# Altium PCB praxis_top_level_pcbdoc_v3_alimentador.PcbDoc
Units mm, origin at the board's own origin, x right, y up, seen from the top; angles counter-clockwise.
Board outline 152.4 x 79.5 mm, 4 copper layers (Top Layer, Int1 (GND), Int2 (PWR), Bottom Layer), stack 1.273 mm thick; 43 components, 266 nets, 129 pads, 129 vias.
Unrouted connection lines stored in the file: 4.
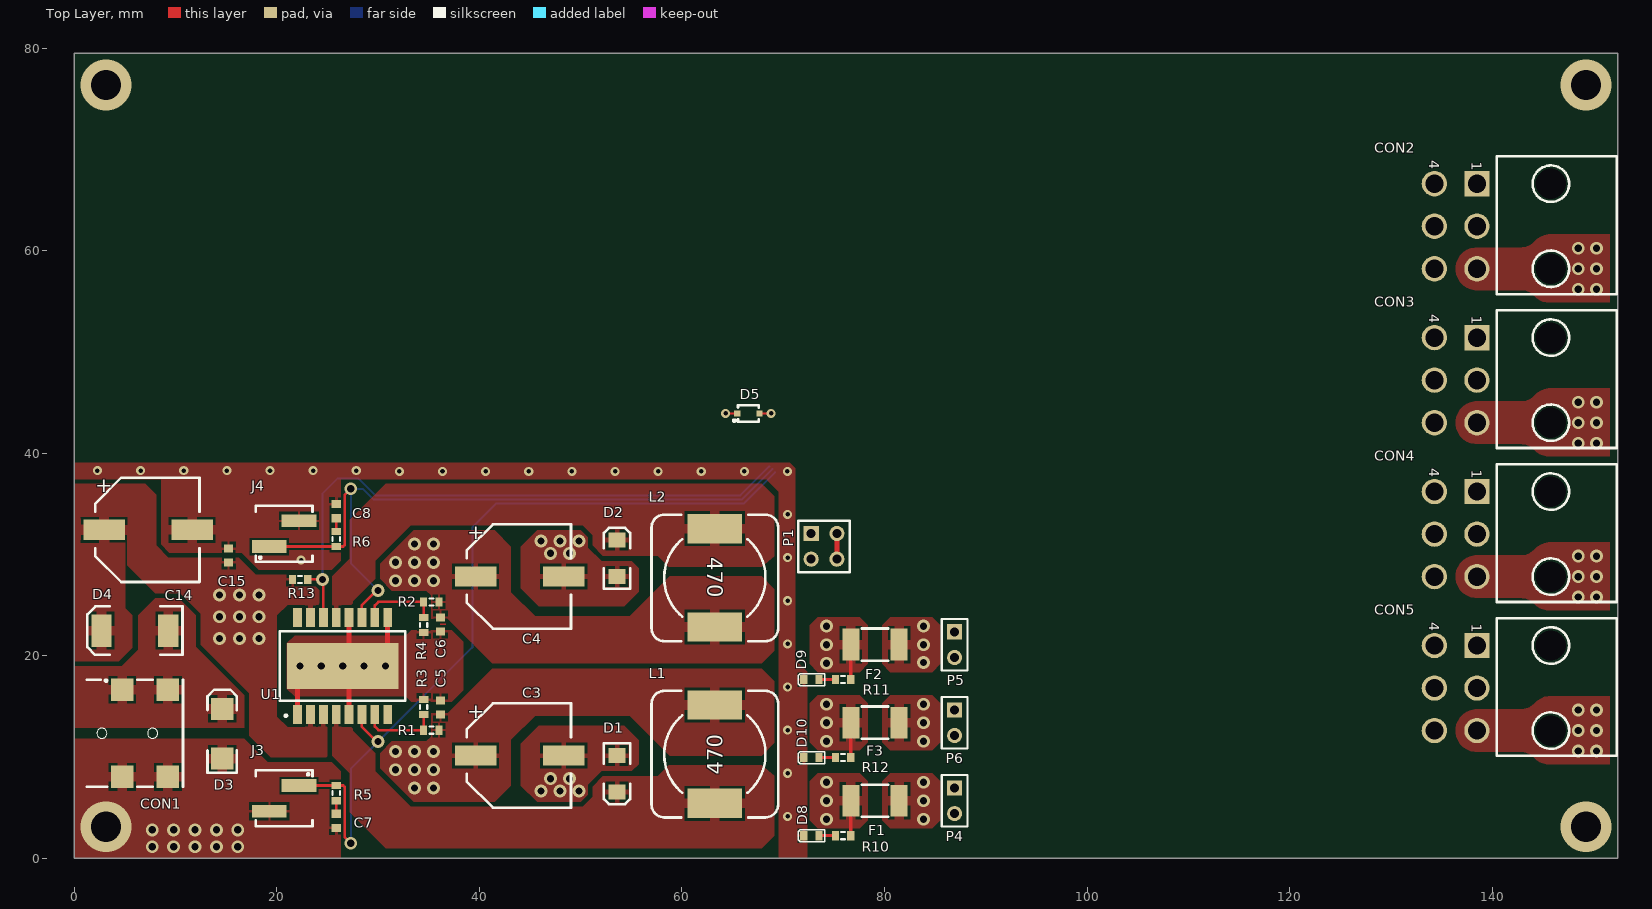
[diagram p0: Top Layer view]
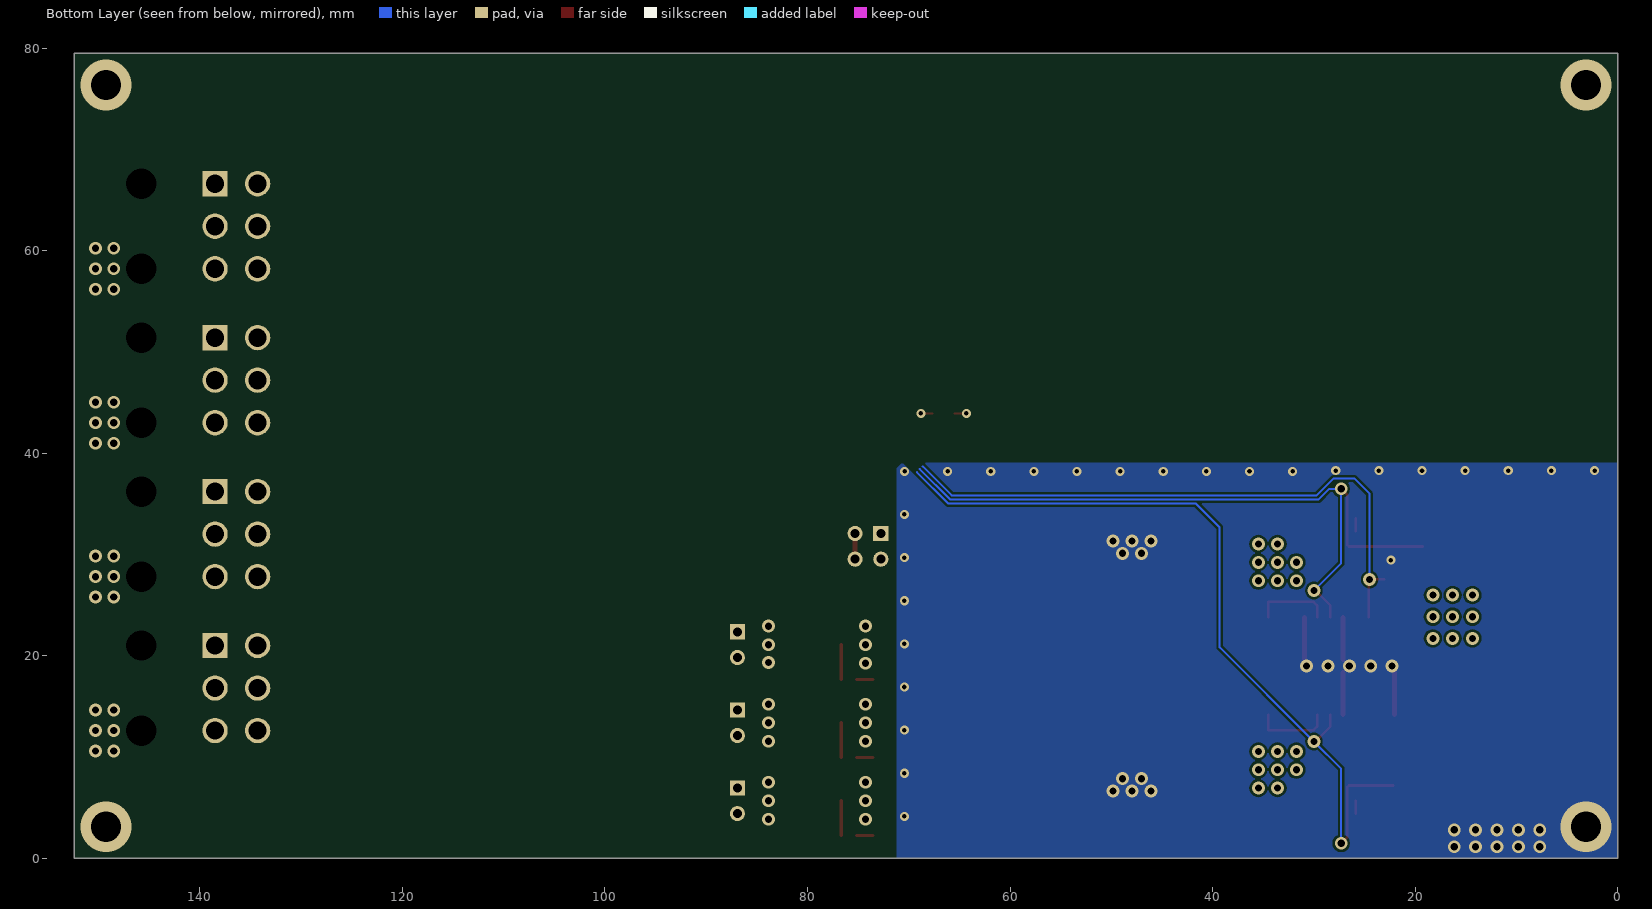
[diagram p1: Bottom Layer view, seen from below]
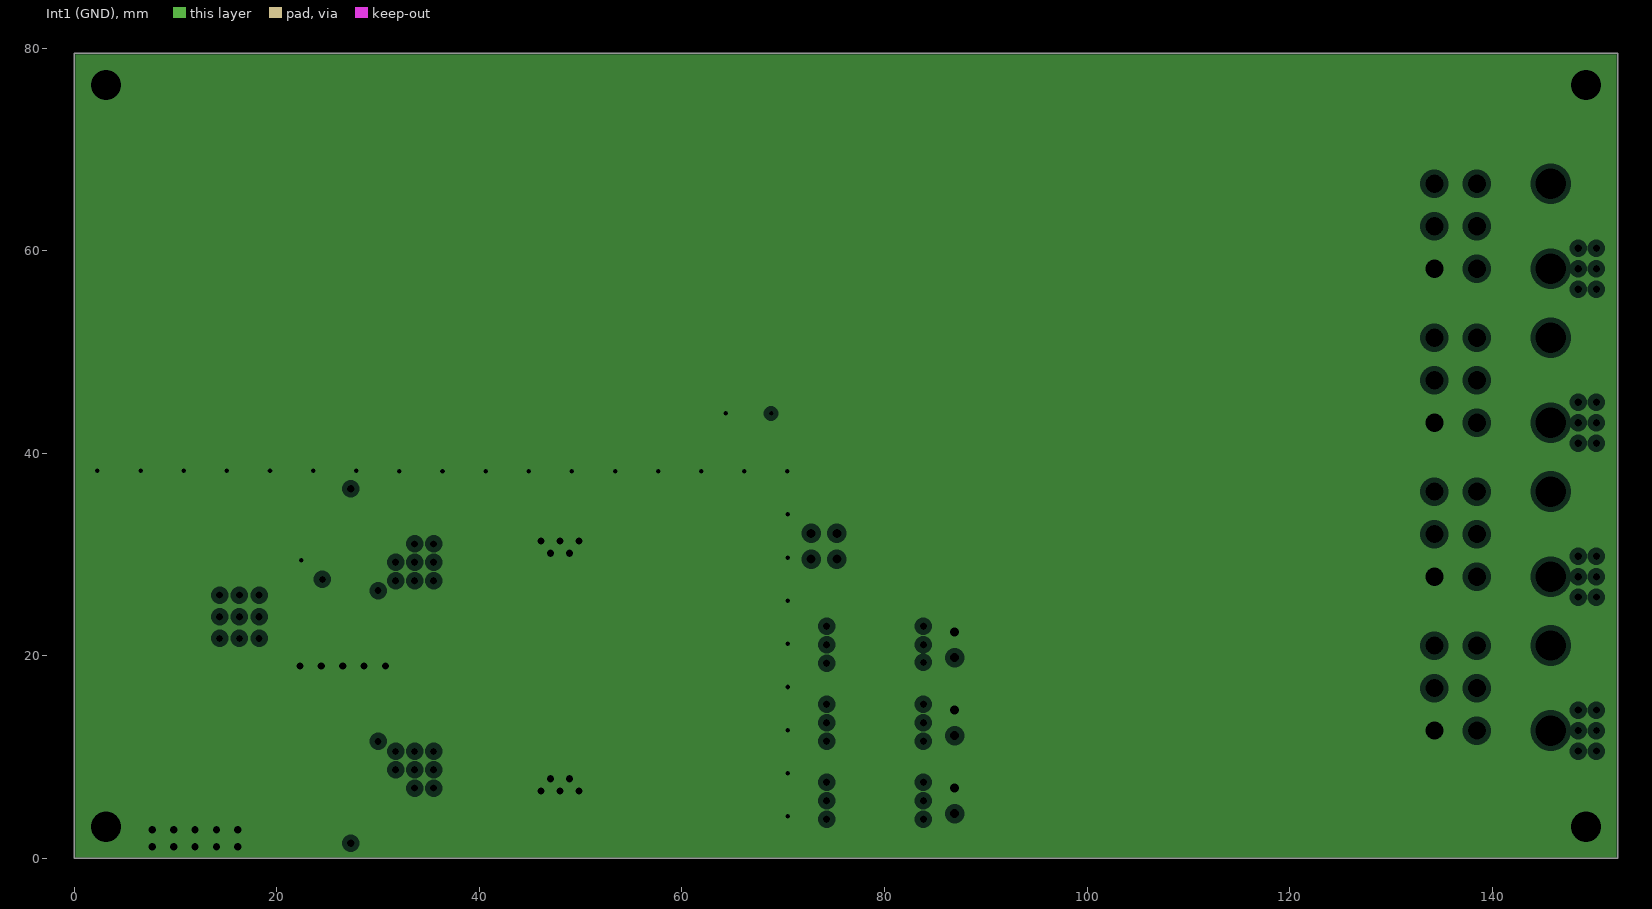
[diagram p2: Int1 (GND), clearances drawn from the general rule]
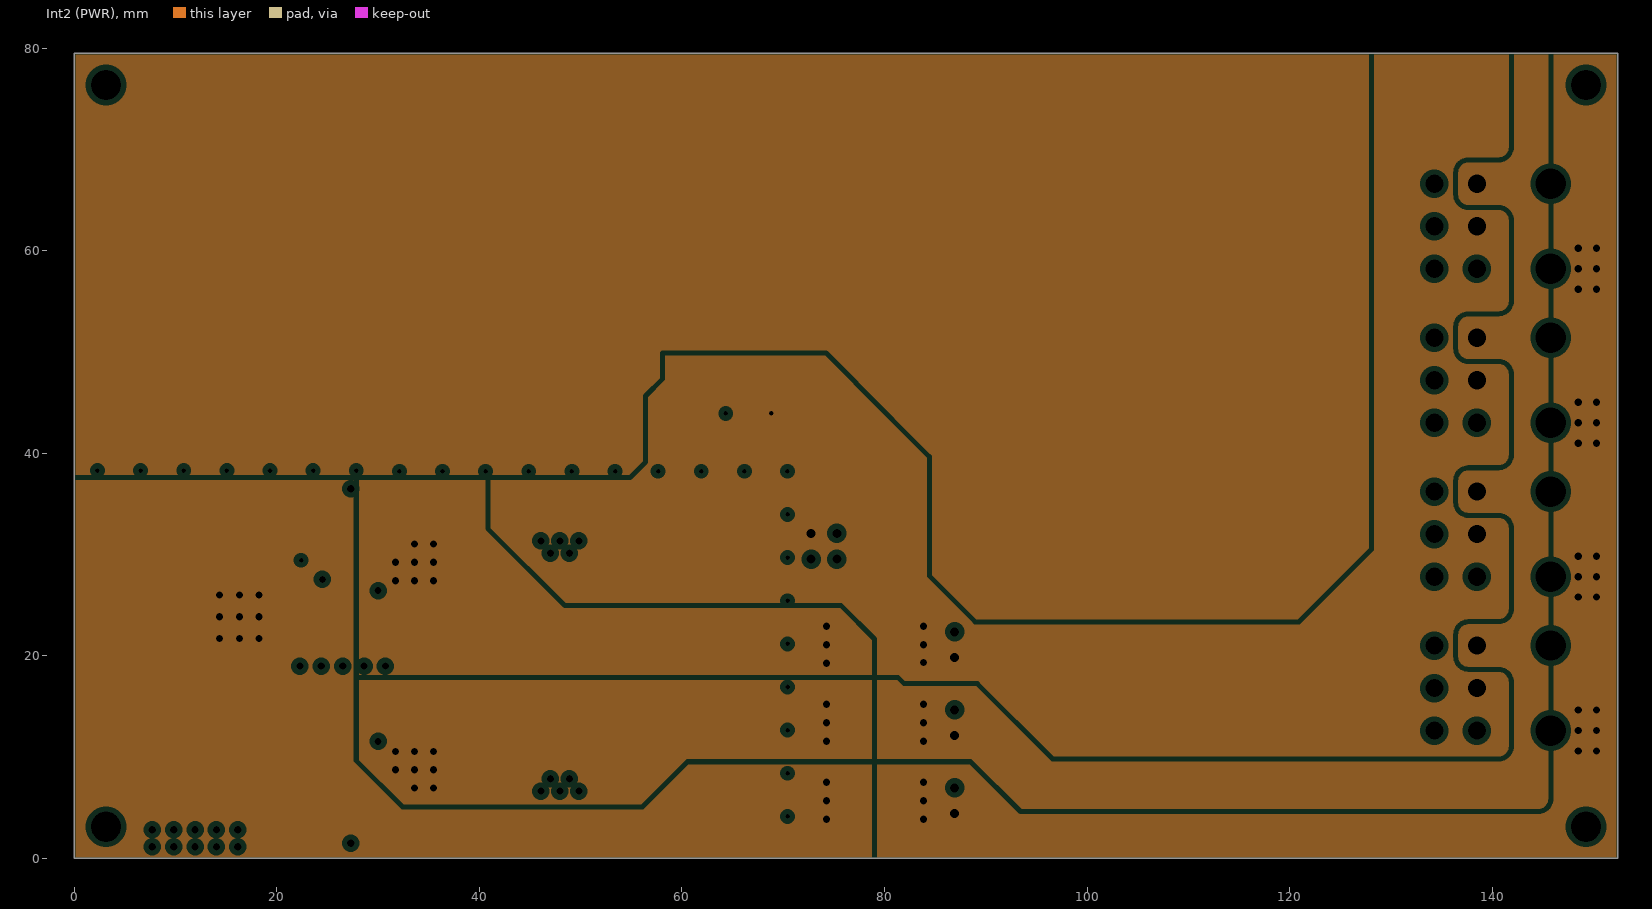
[diagram p3: Int2 (PWR), clearances drawn from the general rule]

## Layer stack, top to bottom
Top Solder: solder mask 0.0254, SM-001, Dk 4
Top Layer: signal copper 0.035
Dielectric 1: prepreg 0.0864, PP-010, Dk 4
Dielectric 2: prepreg 0.0864, PP-010, Dk 4
Int1 (GND): plane copper 0.035, net GND
Dielectric 3: core 0.7874, Core-040, Dk 4.6
Int2 (PWR): plane copper 0.035, net (Multiple Nets)
Dielectric 4: prepreg 0.0864, PP-010, Dk 4
Dielectric 5: prepreg 0.0864, PP-010, Dk 4
Bottom Layer: signal copper 0.035
Bottom Solder: solder mask 0.0254, SM-001, Dk 4

## Board outline
0,0 152.4,0 152.4,79.5 0,79.5

## Design rules (kind name [scope] priority, off if disabled: settings)
Clearance [All] p1: gap=0.254 ignorepadtopadclearanceinfootprint=FALSE except(0: Arc-Hole Track-Hole SMDPad-Hole THPad-Hole Via-Hole Fill-Hole Poly-Hole Region-Hole Text-Hole; 0.2: Arc-Arc Arc-Track Arc-SMDPad Track-Track Track-SMDPad SMDPad-SMDPad)
DiffPairsRouting DiffPairsRouting_STLINK_USB [InDifferentialPair('DP_STLINK_USB')] p1: maxlimit=0.254 minlimit=0.2 mostfreqgap=0.2 toplayer_minwidth=0.25 toplayer_maxwidth=0.381 toplayer_prefwidth=0.307 bottomlayer_minwidth=0.25 bottomlayer_maxwidth=0.381 bottomlayer_prefwidth=0.307 impedanceprofiledriven=TRUE impedanceprofileid={171DCBC4-E7A9-4E61-9777-8B6F89F70602} impedanceprofilevalue=90.000000 maxuncoupledlength=12.7
DiffPairsRouting DiffPairsRouting_USB_OTG_FS [InDifferentialPairClass('All Differential Pairs')] p2: maxlimit=0.254 minlimit=0.2 mostfreqgap=0.2 toplayer_minwidth=0.25 toplayer_maxwidth=0.381 toplayer_prefwidth=0.307 bottomlayer_minwidth=0.25 bottomlayer_maxwidth=0.381 bottomlayer_prefwidth=0.307 impedanceprofiledriven=TRUE impedanceprofileid={171DCBC4-E7A9-4E61-9777-8B6F89F70602} impedanceprofilevalue=90.000000 maxuncoupledlength=12.7
DiffPairsRouting DiffPairsRouting_ETH_TX [InDifferentialPairClass('DIFFPAIR_EHT_NET_TX')] p3: maxlimit=0.254 minlimit=0.21 mostfreqgap=0.21 toplayer_minwidth=0.25 toplayer_maxwidth=0.381 toplayer_prefwidth=0.25 bottomlayer_minwidth=0.25 bottomlayer_maxwidth=0.381 bottomlayer_prefwidth=0.25 impedanceprofiledriven=TRUE impedanceprofileid={305CB325-F830-419B-A8F2-9C7B33C04CC0} impedanceprofilevalue=100.000000 maxuncoupledlength=12.7
DiffPairsRouting DiffPairsRouting_ETH_RX [InDifferentialPairClass('DIFFPAIR_EHT_NET_RX')] p4: maxlimit=0.254 minlimit=0.21 mostfreqgap=0.21 toplayer_minwidth=0.25 toplayer_maxwidth=0.381 toplayer_prefwidth=0.25 bottomlayer_minwidth=0.25 bottomlayer_maxwidth=0.381 bottomlayer_prefwidth=0.25 impedanceprofiledriven=TRUE impedanceprofileid={305CB325-F830-419B-A8F2-9C7B33C04CC0} impedanceprofilevalue=100.000000 maxuncoupledlength=12.7
MatchedLengths "Schematic Matched Net Lengths_7" [InNet('Port_A11')] p1: tolerance=2.54 checknetsindiffpair=TRUE checkdiffpairvsdiffpair=FALSE checkxsignals=FALSE checkothers=FALSE
MatchedLengths "Schematic Matched Net Lengths_6" [InNet('Port_A12')] p2: tolerance=2.54 checknetsindiffpair=TRUE checkdiffpairvsdiffpair=FALSE checkxsignals=FALSE checkothers=FALSE
MatchedLengths "Schematic Matched Net Lengths_5" [InNet('DP_STLINK_USB_P')] p3: tolerance=2.54 checknetsindiffpair=TRUE checkdiffpairvsdiffpair=FALSE checkxsignals=FALSE checkothers=FALSE
MatchedLengths "Schematic Matched Net Lengths_4" [InNet('DP_STLINK_USB_N')] p4: tolerance=2.54 checknetsindiffpair=TRUE checkdiffpairvsdiffpair=FALSE checkxsignals=FALSE checkothers=FALSE
MatchedLengths "Schematic Matched Net Lengths_3" [InNet('DP_ETH_RX_N')] p5: tolerance=2.54 checknetsindiffpair=TRUE checkdiffpairvsdiffpair=FALSE checkxsignals=FALSE checkothers=FALSE
MatchedLengths "Schematic Matched Net Lengths_2" [InNet('DP_ETH_RX_P')] p6: tolerance=2.54 checknetsindiffpair=TRUE checkdiffpairvsdiffpair=FALSE checkxsignals=FALSE checkothers=FALSE
MatchedLengths "Schematic Matched Net Lengths_1" [InNet('DP_ETH_TX_N')] p7: tolerance=2.54 checknetsindiffpair=TRUE checkdiffpairvsdiffpair=FALSE checkxsignals=FALSE checkothers=FALSE
MatchedLengths "Schematic Matched Net Lengths" [InNet('DP_ETH_TX_P')] p8: tolerance=2.54 checknetsindiffpair=TRUE checkdiffpairvsdiffpair=FALSE checkxsignals=FALSE checkothers=FALSE
PlaneClearance [All] p1: clearance=0.508
PlaneConnect [All] p1: planeconnectstyle=Direct reliefexpansion=0.508 reliefentries=4 reliefconductorwidth=0.254 reliefairgap=0.254
PolygonConnect [All] p1: connectstyle=Relief reliefconductorwidth=0.254 reliefentries=4 polygonreliefangle="90 Angle" airgapwidth=0.254
RoutingVias [All] p1: holewidth=0.711 width=1.27 viastyle="Through Hole" minholewidth=0.4 minwidth=0.711 maxholewidth=0.711 maxwidth=1.27
SolderMaskExpansion [All] p1: expansion=0.102 istentingtop=FALSE
Width [All] p1: maxlimit=0.5 minlimit=0.2 preferedwidth=0.254 minimp=50.000000 maximp=50.000000 favimp=50.000000
27 further rules are at their usual default settings.

## Classes and differential pairs
net class Port_H[0..1]: Port_H0 Port_H1
net class Port_G[0..15]: Port_G0 Port_G1 Port_G2 Port_G3 Port_G4 Port_G5 Port_G6 Port_G7 Port_G8 Port_G9 Port_G10 Port_G11 Port_G12 Port_G13 Port_G14 Port_G15
net class Port_F[0..15]: Port_F0 Port_F1 Port_F2 Port_F3 Port_F4 Port_F5 Port_F6 Port_F7 Port_F8 Port_F9 Port_F10 Port_F11 Port_F12 Port_F13 Port_F14 Port_F15
net class Port_E[0..15]: Port_E0 Port_E1 Port_E2 Port_E3 Port_E4 Port_E5 Port_E6 Port_E7 Port_E8 Port_E9 Port_E10 Port_E11 Port_E12 Port_E13 Port_E14 Port_E15
net class Port_D[0..15]: Port_D0 Port_D1 Port_D2 Port_D3 Port_D4 Port_D5 Port_D6 Port_D7 Port_D8 Port_D9 Port_D10 Port_D11 Port_D12 Port_D13 Port_D14 Port_D15
net class Port_C[0..15]: Port_C0 Port_C1 Port_C2 Port_C3 Port_C4 Port_C5 Port_C6 Port_C7 Port_C8 Port_C9 Port_C10 Port_C11 Port_C12 Port_C13 Port_C14 Port_C15
net class Port_B[0..15]: Port_B0 Port_B1 Port_B2 Port_B3 Port_B4 Port_B5 Port_B6 Port_B7 Port_B8 Port_B9 Port_B10 Port_B11 Port_B12 Port_B13 Port_B14 Port_B15
net class Port_A[0..15]: Port_A0 Port_A1 Port_A2 Port_A3 Port_A4 Port_A5 Port_A6 Port_A7 Port_A8 Port_A9 Port_A10 Port_A11 Port_A12 Port_A13 Port_A14 Port_A15
differential pair class NET_CLASS_DP_STLINK_USB: DP_STLINK_USB
differential pair class DIFFPAIR_EHT_NET_TX: DP_ETH_TX
differential pair class DIFFPAIR_EHT_NET_RX: DP_ETH_RX
component class U_modulo_extension_schdoc: CON2 CON3 CON4 CON5
component class U_modulo_alimentador_schdoc: C3 C4 C5 C6 C7 C8 C14 C15 CON1 D1 D2 D3 D4 D8 D9 D10 F1 F2 F3 J3 J4 L1 L2 P1 P4 P5 P6 R1 R2 R3 R4 R5 R6 R10 R11 R12 R13 U1
differential pair DP_STLINK_USB: +DP_STLINK_USB_P -DP_STLINK_USB_N
differential pair DP_ETH_TX: +DP_ETH_TX_P -DP_ETH_TX_N
differential pair DP_ETH_RX: +DP_ETH_RX_P -DP_ETH_RX_N

## Components (designator, comment, footprint, x,y, rotation, side; value= is the part's Value field where it differs from the comment)
C3 "EEEFC1E471P" PCE4009CT 39.624,10.16 r0 top
C4 "EEEFC1E471P" PCE4009CT 39.624,27.84 r0 top
C5 "Cap Semi" 1608[0603] 36.152,14.9 r90 top value=100nF
C6 "Cap Semi" 1608[0603] 36.152,23.1 r270 top value=100nF
C7 "Cap Semi" 1608[0603] 25.865,3.709 r90 top value=1uF
C8 "Cap Semi" 1608[0603] 25.865,34.291 r270 top value=1uF
C14 "EEEFK1H221P" PCE4009CT 2.936,32.444 r0 top
C15 "Cap Semi" 1608[0603] 15.24,29.918 r90 top value=100nF
CON1 "PWR JACK" 694103107102 4.732,16.657 r90 top
CON2 "CONN_HEADER_RA_6POS" CONN_HEADER_RA_6POS 138.5,66.624 r270 top
CON3 "CONN_HEADER_RA_6POS" CONN_HEADER_RA_6POS 138.5,51.424 r270 top
CON4 "CONN_HEADER_RA_6POS" CONN_HEADER_RA_6POS 138.5,36.224 r270 top
CON5 "CONN_HEADER_RA_6POS" CONN_HEADER_RA_6POS 138.5,21.024 r270 top
D1 "SS26SHE3_A/H" SS26SHE3_A/H 53.594,10.16 r270 top
D2 "SS26SHE3_A/H" SS26SHE3_A/H 53.594,27.84 r90 top
D3 "P6SMB13CA" P6SMB13CA 14.605,9.857 r90 top
D4 "Diodo schottky" SK54L-TP 9.282,22.495 r180 top
D5 "PMEG1030EJ" PMEG1030EJ 67.662,43.937 r180 top
D8 "LTST-C191KRKT" LTST-C191KRKT 72.778,2.245 r180 top
D9 "LTST-C191KRKT" LTST-C191KRKT 72.778,17.655 r180 top
D10 "LTST-C191KRKT" LTST-C191KRKT 72.778,9.95 r180 top
F1 "MINISMDC110F-2" MINISMDC110F-2 76.67,5.695 r0 top
F2 "MINISMDC110F-2" MINISMDC110F-2 76.67,21.105 r0 top
F3 "MINISMDC110F-2" MINISMDC110F-2 76.67,13.4 r0 top
J3 "JUMPER_SMD" JUMPER_SMD 22.182,7.2 r270 top
J4 "JUMPER_SMD" JUMPER_SMD 19.262,30.8 r90 top
L1 "SRR1240-470M" SRR1240-470M 63.246,5.445 r90 top
L2 "SRR1240-470M" SRR1240-470M 63.246,32.555 r270 top
P1 "HEADER_2X2" HEADER_2X2 72.76,32.09 r0 top
P4 "Header 2" HDR1X2 86.925,6.965 r270 top
P5 "Header 2" HDR1X2 86.925,22.375 r270 top
P6 "Header 2" HDR1X2 86.925,14.67 r270 top
R1 "Res3" J1-0603 35.251,12.661 r0 top value=2.3K
R2 "Res3" J1-0603 35.251,25.339 r0 top value=4K
R3 "Res3" J1-0603 34.501,14.95 r270 top value=1K
R4 "Res3" J1-0603 34.501,23.05 r90 top value=1K
R5 "Res3" J1-0603 25.865,6.45 r90 top value=1K
R6 "Res3" J1-0603 25.865,31.55 r270 top value=1K
R10 "Res3" J1-0603 75.92,2.245 r0 top value=333
R11 "Res3" J1-0603 75.92,17.655 r0 top value=100
R12 "Res3" J1-0603 75.92,9.95 r0 top value=43
R13 "Res3" J1-0603 22.3,27.55 r180 top value=10K
U1 "SPI-8001TW" SPI-8001TW-TL 26.5,19 r90 top

## Footprints (in the part's own frame and the unit in brackets; to place one, negate y for a bottom-side part, rotate by r counter-clockwise, add the part's x,y. Pads: shape width x height; smd on the part's side, far side on the other; paste and mask are expansions set on the pad)
1608[0603] [mm] "Chip Capacitor, Body 1.6x0.8mm, IPC High Density"
  rect 0.8x0.9 smd: 1(-0.7,0) 2(0.7,0)
  body extent -0.8,-0.4 0.8,0.4, height 0.8
694103107102 [mm]
  rect 2.2x2.2 smd: 1(0,0) 1(0,-4.5) 2(-8.6,0) 3(-8.6,-4.5)
  silkscreen extent -9.6,-6 1,3.5, body extent -9.2,-5.8 0.6,3.5, height 5.29
CONN_HEADER_RA_6POS [mm]
  rect 2.5x2.5 hole 1.8: 1(0,0)
  round 2.5 hole 1.8: 2(4.2,0) 3(8.4,0) 4(0,-4.2) 5(4.2,-4.2) 6(8.4,-4.2)
  round 0 hole 3: ""(0,7.3) ""(8.4,7.3)
  silkscreen extent -2.7,1.97 10.9,13.8, body extent -3.23,-4.7 11.07,13.73, height 11.1
HDR1X2 [mm] "Connector; Header; 2 Position"
  rect 1.5x1.5 hole 0.9: 1(0,0)
  round 1.5 hole 0.9: 2(2.54,0)
  silkscreen extent -1.27,-1.27 3.81,1.27
HEADER_2X2 [mm]
  rect 1.5x1.5 hole 0.9: 1(0,0)
  round 1.5 hole 0.9: 2(2.54,0) 3(0,-2.54) 4(2.54,-2.54)
  silkscreen extent -1.27,-3.82 3.82,1.27, body extent -1.27,-3.83 3.81,1.26, height 8.49
J1-0603 [mm] "Chip Resistor, Body 1.6x0.8mm, IPC High Density"
  rect 0.7x0.9 smd: 1(-0.75,0) 2(0.75,0)
  silkscreen extent -0.2,-0.35 0.2,0.35, body extent -0.85,-0.48 0.85,0.48, height 0.9
JUMPER_SMD [mm]
  rect 1.27x3.43 smd: 1(0,0) 2(2.54,-2.92)
  silkscreen extent -1.5,-4.26 4.04,1.34, body extent -1.27,-4.1 3.81,1.18, height 17.21
LTST-C191KRKT [mm]
  rect 0.7x0.9 smd: 1(-0.747,0) 2(0.753,0)
  silkscreen extent -1.3,-0.6 1.3,0.6, body extent -0.85,-0.45 0.85,0.45, height 0.9
MINISMDC110F-2 [mm]
  rect 1.68x3.15 smd: 1(0,0) 2(4.78,0)
  silkscreen extent 1.09,-1.6 3.69,1.6, body extent 0.01,-1.72 4.76,1.71, height 0.49
P6SMB13CA [mm]
  rect 2.16x2.26 smd: 1(0,0) 2(4.9,0)
  silkscreen extent -1.4,-1.45 6.8,1.45, body extent -0.34,-1.97 5.24,1.97, height 2.49
PCE4009CT [mm]
  rect 4.1x2 smd: 1(0,0) 2(8.7,0)
  silkscreen extent -0.88,-5.15 9.42,5.15, body extent -1.47,-5.15 10.13,5.15, height 10.2
PMEG1030EJ [mm]
  rect 0.6x0.6 smd: 1(0,0) 2(2.2,0)
  silkscreen extent 0.07,-0.8 2.6,0.8, body extent -0.15,-0.67 2.35,0.68, height 1
SK54L-TP [mm]
  rect 2x3.2 smd: 1(0,0) 2(6.6,0)
  silkscreen extent -1.4,-2.4 8,2.4, body extent -0.76,-2.95 7.19,2.95, height 2.28
SPI-8001TW-TL [mm] "SOP, 16-Leads, Body 12,20x7,50mm, Pitch 1,27mm, Thermal Pad 11,00x4,50mm, IPC Medium Density"
  rect 1.9x0.87 smd: 1(-4.8,4.445) 2(-4.8,3.175) 3(-4.8,1.905) 4(-4.8,0.635) 5(-4.8,-0.635) 6(-4.8,-1.905) 7(-4.8,-3.175) 8(-4.8,-4.445) 9(4.8,-4.445) 10(4.8,-3.175) 11(4.8,-1.905) 12(4.8,-0.635) 13(4.8,0.635) 14(4.8,1.905) 15(4.8,3.175) 16(4.8,4.445)
  rect 4.5x11 smd: 17(0,0)
  silkscreen extent -5,-6.2 3.45,6.2, body extent -5.15,-5.1 5.15,5.1, height 3.48
SRR1240-470M [mm]
  rect 2.9x5.4 smd: 1(0,0) 2(9.7,0)
  silkscreen extent -1.4,-6.25 11.1,6.25, body extent -1.4,-6.25 11.1,6.25, height 4.5
SS26SHE3_A/H [mm]
  rect 1.52x1.68 smd: 1(0,0) 2(3.6,0)
  silkscreen extent -1.2,-1.3 4.8,1.3, body extent -0.95,-1.4 4.55,1.4, height 2.55

## Part data
C3 C4: "CAP ALUM 470uF 20% 25V SMD", Capacitance=470uF, Case/Package=Radial, ESR (Equivalent Series Resistance)=150mR, Leakage Current=3uA, Manufacturer=Panasonic, Max Operating Temperature=105°C, Min Operating Temperature=-40°C, Package Quantity=1, Ripple Current=670mA, Tolerance=20%, Voltage=25V, Category="Aluminum Electrolytic Capacitors", Contact Plating=Tin, Diameter=10mm, Height=10.2mm, Height - Seated (Max)=0.402inch, Impedance=150mR, Lead Diameter=0.9mm, Lead Free="Lead Free", Lead Pitch=4.6mm, Length=10.5mm, Life (Hours)=1000Hour, Manufacturer Part Number=EEEFC1E471P, Material=Aluminium, Mount="Surface Mount,PCB", Packaging="Tape and Reel", Radiation Hardening=No, REACH SVHC="No SVHC", Ripple Current (AC)=670mA, Supplier 1=Digi-Key, Termination=SMD/SMT, Voltage Rating=25V, Voltage Rating (DC)=25V, Width=900um
C5 C6 C7 C8 C15: "Capacitor (Semiconductor SIM Model)", LatestRevisionDate=29-May-2009, LatestRevisionNote="IPC-7351 Footprint Added.", PackageDescription="Chip Capacitor", PackageReference=C1206, Published=8-Jun-2000, Publisher="Altium Limited"
C14: "CAP ALUM 220UF 20% 50V SMD", Capacitance=220uF, Case/Package=Radial, Dielectric Material=Aluminium, ESR (Equivalent Series Resistance)=180mR, Leakage Current=3uA, Manufacturer=Panasonic, Manufacturer Part Number=EEE-FK1H221P, Max Operating Temperature=105°C, Min Operating Temperature=-55°C, Package Quantity=500, Ripple Current=670mA, Tolerance=20%, Voltage=50V, Category="Aluminum Electrolytic Capacitors", Contact Plating=Tin, Diameter=10mm, Height=10.2mm, Height - Seated (Max)=0.413inch, Impedance=180mR, Lead Free="Lead Free", Length=10.2mm, Life (Hours)=2000Hour, Material=Aluminium, Mount="Surface Mount,PCB", Number of Pins=2, Packaging="Tape and Reel", Polarity=Polar, Radiation Hardening=No, REACH SVHC="No SVHC", Ripple Current (AC)=670mA, Supplier 1="Future Electronics", Termination=SMD/SMT, Voltage Rating=50V, Voltage Rating (DC)=50V, Width=12mm
CON1: library part 694103107102, "CONN PWR JACK DC RA SMD", Color=Black, Current Rating=5A, Flammability Rating="UL94 V-0", Insulation Resistance=100MR, Manufacturer="Wurth Electronics", Max Operating Temperature=85°C, Min Operating Temperature=-40°C, Package Quantity=500, Voltage Rating=18V, Category=Connectors, ComponentLink1Description=http://www.mouser.com/ds/2/445/6941xx107102-469263.pdf?src-supplier=Mouser, ComponentLink1URL=http://www.mouser.com/ds/2/445/6941xx107102-469263.pdf?src-supplier=Mouser, ComponentLink2Description=http://www.farnell.com/cad/2130962.pdf?src-supplier=Element14, ComponentLink2URL=http://www.farnell.com/cad/2130962.pdf?src-supplier=Element14, Connector Type=Jack,Power, Contact Gender=Female, Contact Material="Copper Alloy", Contact Plating=Tin, Gender=Male, Housing Material=Polyamide, Manufacturer Part Number=694103107102, Mount="Surface Mount", Packaging="Tape and Reel", Pricing 1="1=1,56000, 10=1,48500, 50=1,32600, 100=1,22000 (USD)", REACH SVHC=Unknown, RoHS=Yes, Shielding=Unshielded, Stock 1=467, Supplier 1=Digi-Key, Termination=SMD/SMT, Voltage Rating (DC)=18V
CON2 CON3 CON4 CON5: "Conector hembra de 6 posiciones molex", Current Rating=8A, Manufacturer=Molex, Manufacturer Part Number=45732-0001, Max Operating Temperature=105°C, Min Operating Temperature=-40°C, Package Quantity=300, Voltage Rating=600V, Category="Headers and Wire Housings", Contact Material=Brass, Contact Plating=Tin, Gender=Male, Housing Material=Thermoplastic, Mount="Through Hole", Number of Contacts=6, Number of Positions=6, Number of Rows=2, Orientation="Right Angle", Packaging=Tray, Pitch=4.2mm, Radiation Hardening=No, Row Spacing=4.2mm, Termination=Solder
D1 D2: "DIODE SCHOTTKY 60V 2A DO214AC", Average Rectified Current=2A, Case/Package=SMA, Forward Voltage=750mV, Manufacturer=Vishay, Manufacturer Part Number="SS26SHE3\"A/H", Max Forward Surge Current (Ifsm)=40A, Max Operating Temperature=150°C, Max Repetitive Reverse Voltage (Vrrm)=60V, Min Operating Temperature=-55°C, Package Quantity=1800, Peak Reverse Current=10mA, Category="Rectifier Diodes", Element Configuration=Single, Forward Current=2A, Height=2.29mm, Lead Free="Lead Free", Length=4.5mm, Max Reverse Voltage (DC)=60V, Mount="Surface Mount", Number of Pins=2, Packaging="Tape and Reel", Peak Non-Repetitive Surge Current=40A, Radiation Hardening=No, Reverse Voltage (DC)=60V, Supplier 1=Digi-Key, Termination=SMD/SMT, Weight=0.001199oz, Width=2.79mm
D3: "TVS DIODE 11.1V 18.2V DO214AA", Breakdown Voltage=12.4V, Case/Package=SMB, Clamping Voltage=18.2V, Leakage Current=1uA, Manufacturer=Littelfuse, Max Operating Temperature=150°C, Max Surge Current=33A, Min Operating Temperature=-55°C, Operating Supply Voltage=11.1V, Package Quantity=3000, Peak Pulse Current=33.5A, Peak Pulse Power=600W, Power Line Protection=No, Test Current=1mA, Category="TVS Diodes", ComponentLink1Description=https://datasheet.ciiva.com/331/littelfuse-tvs-diode-p6smb-datasheet-pdf-331680.pdf?src-supplier=Digi-Key, ComponentLink1URL=https://datasheet.ciiva.com/331/littelfuse-tvs-diode-p6smb-datasheet-pdf-331680.pdf?src-supplier=Digi-Key, ComponentLink2Description=https://datasheet.ciiva.com/331/littelfuse-tvs-diode-p6smb-datasheet-pdf-331681.pdf?src-supplier=Digi-Key, ComponentLink2URL=https://datasheet.ciiva.com/331/littelfuse-tvs-diode-p6smb-datasheet-pdf-331681.pdf?src-supplier=Digi-Key, ComponentLink3Description=https://datasheet.ciiva.com/331/littelfuse-tvs-diode-p6smb-datasheet-pdf-331679.pdf?src-supplier=Digi-Key, ComponentLink3URL=https://datasheet.ciiva.com/331/littelfuse-tvs-diode-p6smb-datasheet-pdf-331679.pdf?src-supplier=Digi-Key, Composition=Zener, Lead Free="Lead Free", Manufacturer Part Number=P6SMB13CA, Min Breakdown Voltage=12.4V, Mount="Surface Mount", Number of Bidirectional Channels=1, Number of Channels=1, Number of Elements=1, Number of Pins=2, Packaging="Tape and Reel", Polarity=Bidirectional, Pricing 1="1=0,38000, 10=0,28000, 100=0,19500, 500=0,12350, 1000=0,09880 (USD)", Reverse Breakdown Voltage=12.4V, Reverse Standoff Voltage=11.1V, RoHS=Yes, Stock 1=2958, Supplier 1=Digi-Key, Termination=SMD/SMT
D4: library part SK54L-TP, "DIODE SCHOTTKY 40V 5A DO214AB", Average Rectified Current=5A, Forward Voltage=550mV, Manufacturer=MCC, Max Operating Temperature=150°C, Max Repetitive Reverse Voltage (Vrrm)=40V, Max Reverse Current=1mA, Min Operating Temperature=-55°C, Natural Thermal Resistance=16°C/W, Package Quantity=1, Peak Non-Repetitive Surge Current=100A, Category="Rectifier Diodes", ComponentLink1Description=https://datasheet.ciiva.com/13064/sk52l-sk510ldo-214ab-50991-13064420.pdf?src-supplier=Mouser, ComponentLink1URL=https://datasheet.ciiva.com/13064/sk52l-sk510ldo-214ab-50991-13064420.pdf?src-supplier=Mouser, ComponentLink2Description=https://datasheet.ciiva.com/17442/sk52l-sk510ldo-214ab-17442205.pdf?src-supplier=Future+Electronics, ComponentLink2URL=https://datasheet.ciiva.com/17442/sk52l-sk510ldo-214ab-17442205.pdf?src-supplier=Future+Electronics, ComponentLink3Description=https://datasheet.ciiva.com/18567/sk52l-sk510ldo-214ab-18567181.pdf?src-supplier=Digi-Key, ComponentLink3URL=https://datasheet.ciiva.com/18567/sk52l-sk510ldo-214ab-18567181.pdf?src-supplier=Digi-Key, ComponentLink4Description=https://datasheet.ciiva.com/26844/getdatasheetpartid-202301-26844906.pdf?src-supplier=Verical, ComponentLink4URL=https://datasheet.ciiva.com/26844/getdatasheetpartid-202301-26844906.pdf?src-supplier=Verical, ComponentLink5Description=https://datasheet.ciiva.com/15045/sk52l-sk510ldo-214ab-15045311.pdf?src-supplier=Digi-Key, ComponentLink5URL=https://datasheet.ciiva.com/15045/sk52l-sk510ldo-214ab-15045311.pdf?src-supplier=Digi-Key, Element Configuration=Single, Lead Free="Lead Free", Manufacturer Part Number=SK54L-TP, Max Reverse Voltage (DC)=40V, Mount="Surface Mount", Number of Pins=2, Packaging="Tape and Reel", Pricing 1="1=0,44000, 10=0,35000, 100=0,27500, 500=0,19000, 1000=0,15000 (USD)", Radiation Hardening=No, RoHS=Yes, Stock 1=514, Supplier 1=Digi-Key
D5: "DIODE SCHOTTKY 10V 3A SOD323F", Manufacturer=Nexperia, Manufacturer Part Number=PMEG1030EJ,115, Supplier 1=Digi-Key
D8 D9 D10: "DIODO LED ROJO 0603", Case Code (Imperial)=0603, Case Code (Metric)=1608, Color=Red, Forward Current=30mA, Forward Voltage=2V, Lens Color=Colorless, Manufacturer="Vishay Lite-On", Max Operating Temperature=85°C, Min Operating Temperature=-55°C, Package Quantity=1, Power Dissipation=75mW, Reverse Voltage=5V, Test Current=20mA, Case/Package=0603, Category=LEDs, Depth=0.8mm, Dominant Wavelength=631nm, Height=0.55mm, Illumination Color=Red, Lead Free="Lead Free", Length=1.6mm, Lens Style=Clear,Diffused,Colorless,Rectangular, Lens Transparency=Clear, Luminous Intensity=54mcd, Manufacturer Part Number=LTST-C191KRKT, Mount="Surface Mount", Number of Elements=1, Number of LEDs=1, Number of Pins=2, Packaging="Tape and Reel", Power Rating=75mW, Radiation Hardening=No, Supplier 1=Digi-Key, Viewing Angle=130°, Voltage=2V, Wavelength=639nm, Width=0.8mm
F1 F2 F3: "LITTELFUSE - MINISMDC110F-2 - FUSE, PTC RESET, 8V, 1.1A, 1812", Hold Current=1.1A, Manufacturer=Littelfuse, Max Operating Temperature=85°C, Min Operating Temperature=-40°C, Operating Supply Voltage=8V, Category="PTC Resettable Fuses", ComponentLink1Description=http://www.farnell.com/datasheets/2282569.pdf?src-supplier=Farnell, ComponentLink1URL=http://www.farnell.com/datasheets/2282569.pdf?src-supplier=Farnell, ComponentLink2Description=http://www.farnell.com/datasheets/1468628.pdf?src-supplier=Farnell, ComponentLink2URL=http://www.farnell.com/datasheets/1468628.pdf?src-supplier=Farnell, ComponentLink3Description=https://www.littelfuse.com/~/media/electronics/product_specifications/resettable_ptcs/littelfuse_ptc_minismdc110f_2_product_specification.pdf.pdf?src-supplier=Digi-Key, ComponentLink3URL=https://www.littelfuse.com/~/media/electronics/product_specifications/resettable_ptcs/littelfuse_ptc_minismdc110f_2_product_specification.pdf.pdf?src-supplier=Digi-Key, ComponentLink4Description=http://www.farnell.com/datasheets/1468628.pdf?src-supplier=Element14, ComponentLink4URL=http://www.farnell.com/datasheets/1468628.pdf?src-supplier=Element14, ComponentLink5Description=http://www.littelfuse.com/~/media/electronics/datasheets/resettable_ptcs/littelfuse_ptc_minismd_catalog_datasheet.pdf.pdf?src-supplier=Digi-Key, ComponentLink5URL=http://www.littelfuse.com/~/media/electronics/datasheets/resettable_ptcs/littelfuse_ptc_minismd_catalog_datasheet.pdf.pdf?src-supplier=Digi-Key, ComponentLink6Description=http://www.farnell.com/datasheets/2282569.pdf?src-supplier=Newark, ComponentLink6URL=http://www.farnell.com/datasheets/2282569.pdf?src-supplier=Newark, Lead Free="Lead Free", Length=4.73mm, Manufacturer Part Number=MINISMDC110F-2, Pricing 1="1=0,22546, 10=0,20584, 30=0,19964, 50=0,18972, 100=0,18476 (USD)", REACH SVHC=Unknown, RoHS=No, Supplier 1=Digi-Key, Voltage Rating (DC)=8V
J3 J4: "Connector Header Surface Mount 2 position 0.100\" (2.54mm)", Color=Black, Manufacturer=Samtec, Manufacturer Part Number=TSM-102-01-L-SV-TR, Max Current Rating=7A, Max Operating Temperature=125°C, Max Voltage Rating (AC)=475V, Min Operating Temperature=-55°C, Category="Headers and Wire Housings", Connector Type="Male Pin", Contact Material=Bronze, Contact Mating Length=0.23inch, Contact Plating=Gold, Depth=2.54mm, Gender=Male, Housing Color=Black, Housing Material=Polymer, Lead Free="Lead Free", Length=5.08mm, Mount="Surface Mount", Number of Contacts=2, Number of Positions=2, Number of Rows=1, Orientation=Straight, Packaging="Tape and Reel", Pitch=2.54mm, Radiation Hardening=No, REACH SVHC="No SVHC", Supplier 1=Digi-Key, Termination=Solder
L1 L2: "FIXED IND 47uH 2A 135M Ohm SMD", Case/Package=Nonstandard, Current Rating=2A, DC Resistance (DCR)=135mR, Frequency=13MHz, Inductance=47uH, Inductance Tolerance=20%, Manufacturer=Bourns, Max Operating Temperature=125°C, Min Operating Temperature=-40°C, Package Quantity=800, Resistance=135MR, Saturation Current=1.8A, Test Frequency=100kHz, Category="Fixed Inductors", Composition=Wirewound, Core Material=Ferrite, DC Current=2A, Depth=12.8mm, Height=4mm, Height - Seated (Max)=0.177inch, Length=12.5mm, Manufacturer Part Number=SRR1240-470M, Material=Steel, Max DC Current=2A, Military Standard=Not, Mount="Surface Mount", Packaging="Cut Tape", Q Factor=19, Radiation Hardening=No, REACH SVHC="No SVHC", RMS Current (Irms)=2A, Self Resonant Frequency=13MHz, Shielding=Shielded, Supplier 1=Digi-Key, Termination=SMD/SMT, Tolerance=20%, Width=12.5mm
P1: "Header, 2-Pin X 2"
P4 P5 P6: "Header, 2-Pin", LatestRevisionDate=17-Jul-2002, LatestRevisionNote="Re-released for DXP Platform.", Publisher="Altium Limited"
R1 R2 R3 R4 R5 R6 R10 R11 R12 R13: "Resistor", LatestRevisionDate=29-May-2009, LatestRevisionNote="IPC-7351 Footprint Added.", PackageDescription="Chip Resistor", PackageReference=J1-0603, Published=8-Jun-2000, Publisher="Altium Limited"
U1: library part SPI-8001TW-TL, "IC REG BUCK ADJ 1.5A DL 16-HSOP", Case/Package=SOIC, Manufacturer="Allegro MicroSystems Sanken", Max Input Voltage=20V, Max Operating Temperature=135°C, Max Output Voltage=16V, Min Input Voltage=4V, Min Operating Temperature=-30°C, Min Output Voltage=1V, Output Current=1.5A, Package Quantity=1400, Switching Frequency=250kHz, Category="Voltage Regulators - Switching", ComponentLink1Description=https://datasheet.ciiva.com/29734/spi-8001tw-ds-en-29734001.pdf?src-supplier=Digi-Key, ComponentLink1URL=https://datasheet.ciiva.com/29734/spi-8001tw-ds-en-29734001.pdf?src-supplier=Digi-Key, ComponentLink2Description=https://datasheet.ciiva.com/29733/h1-o03eh0-29733998.pdf?src-supplier=Digi-Key, ComponentLink2URL=https://datasheet.ciiva.com/29733/h1-o03eh0-29733998.pdf?src-supplier=Digi-Key, ComponentLink3Description=https://datasheet.ciiva.com/29733/h1-o03eh0-29733994.pdf?src-supplier=Digi-Key, ComponentLink3URL=https://datasheet.ciiva.com/29733/h1-o03eh0-29733994.pdf?src-supplier=Digi-Key, Manufacturer Part Number=SPI-8001TW-TL, Mount="Surface Mount", Number of Outputs=2, Number of Pins=16, Output Configuration=Positive, Output Type=Adjustable, Packaging="Tape and Reel", Pricing 1="1=3,10000, 10=2,78500, 25=2,63240, 100=2,16450, 250=1,94220, 500=1,87200 (USD)", RoHS=Yes, Stock 1=1392, Supplier 1=Digi-Key, Synchronous Rectifier=No

## Via types
v1: diameter 1.27, hole 0.711, Top Layer to Bottom Layer, 97 vias
v2: diameter 0.9, hole 0.45, Top Layer to Bottom Layer, 28 vias
v3: diameter 5, hole 3, Top Layer to Bottom Layer, 4 vias

## Nets (pads, with @x,y where several pads share a name; then routed paths per layer and width w, separated by ;. In a path a pad name is that pad's centre, name@x,y a point inside that pad or via, vN(x,y) a via of type N, cw(c..) or ccw(c..) an arc to the next point about the centre after c; other vN are vias at no path point)
+3V3_MCP1825: 
+3V3_MIC5301: 
+3V3_SPI: C3.1 C5.1 F3.1 L1.2 R1.2 R12.2 | length 3.4
  Top Layer w0.3: R12.2 F3.1
  other v1: 33.6,6.95 35.475,6.95 31.725,8.762 33.6,8.762 35.475,8.762 31.725,10.561 33.6,10.561 35.475,10.561 74.276,11.571 74.276,13.4 74.276,15.229
+3V3_SPI_FUSE: CON2.1 CON3.1 CON4.1 CON5.1 F3.2 P6.2
  other v1: 83.844,11.571 83.844,13.4 83.844,15.229
+3V3_STLINK: 
+5V: P1.2 P1.4 | length 2.5
  Top Layer w0.5: P1.4 P1.2
+5V_BAT: P1.3
+5V_OTG_FS: 
+5V_SPI: C4.1 C6.1 F2.1 L2.2 R2.2 R11.2 | length 3.4
  Top Layer w0.3: R11.2 F2.1
  other v1: 74.276,19.276 74.276,21.105 74.276,22.934 31.725,27.425 33.6,27.425 35.475,27.425 31.725,29.238 33.6,29.238 35.475,29.238 33.6,31.05 35.475,31.05
+5V_SPI_FUSE: CON2.2 CON3.2 CON4.2 CON5.2 D5.1 F2.2 P1.1 P5.2 | length 1.1
  Top Layer w0.2: D5.1 v2(68.804,43.937)
  other v1: 83.844,19.358 83.844,21.105 83.844,22.934
+5V_STLINK: 
+5V_USB_STLINK: 
+12V: C14.1 C15.1 D4.2 F1.1 R10.2 R13.2 U1.2 U1.3 U1.15 | length 3.4
  Top Layer w0.3: R10.2 F1.1
  other v1: 74.276,3.866 74.276,5.695 74.276,7.524 14.35,21.725 16.3,21.725 18.25,21.725 14.35,23.863 16.3,23.863 18.25,23.863 14.35,26 16.3,26 18.25,26
+12V_FUSE: CON2.3 CON3.3 CON4.3 CON5.3 F1.2 P4.2
  other v1: 83.844,3.866 83.844,5.695 83.844,7.524 148.5,10.6 150.3,10.6 148.5,12.624 150.3,12.624 148.5,14.648 150.3,14.648 148.5,25.8 150.3,25.8 148.5,27.824 150.3,27.824 148.5,29.848 150.3,29.848 148.5,41 150.3,41 148.5,43.024 150.3,43.024 148.5,45.048 150.3,45.048 148.5,56.2 150.3,56.2 148.5,58.224 150.3,58.224 148.5,60.248 150.3,60.248
+12V_JACK: CON1.1 D3.2 D4.1
AIN_1: 
BOOT0: 
BYPASS: 
C/E: R13.1 U1.14 | length 60.4
  Top Layer w0.254: R13.1 v1(24.5,27.55) 24.595,27.455 U1.14
  Bottom Layer w0.2: v1(24.5,27.55) 24.5,36.025 26,37.525 28.05,37.525 29.725,35.85 65.769,35.85 68.634,38.716
CAN_H: CON5.4
CAN_L: CON5.5
CT: 
DP_ETH_RX_N: 
DP_ETH_RX_P: 
DP_ETH_TX_N: 
DP_ETH_TX_P: 
DP_STLINK_USB_N: 
DP_STLINK_USB_P: 
EN: 
GND: C3.2 C4.2 C5.2 C6.2 C7.1 C8.1 C14.2 C15.2 CON1.2 CON1.3 CON2.6 CON3.6 CON4.6 CON5.6 D1.1 D2.1 D3.1 D5.2 D8.2 D9.2 D10.2 J3.2 J4.2 P4.1 P5.1 P6.1 R3.1 R4.1 U1.1 U1.5 U1.9 U1.12 U1.17 | length 17.8
  Top Layer w0.2: v2(64.32,43.937) D5.2
  Top Layer w0.5: U1.1 U1.17@22.055,18.365 ; U1.5 U1.17@27.135,18.365 ; U1.17@27.135,19.635 U1.12 ; U1.17@30.945,19.635 U1.9
  other v1: 7.7,1.15 9.811,1.15 11.922,1.15 14.034,1.15 16.145,1.15 7.7,2.825 9.811,2.825 11.922,2.825 14.034,2.825 16.145,2.825 46.075,6.65 47.95,6.65 49.825,6.65 47.012,7.875 48.887,7.875 22.278,19 24.389,19 26.5,19 28.611,19 30.722,19 47.012,30.125 48.887,30.125 46.075,31.35 47.95,31.35 49.825,31.35
  other v2: 70.429,4.154 70.429,8.413 70.429,12.672 70.429,16.93 70.429,21.189 70.429,25.448 22.4,29.45 70.429,29.707 70.429,33.966 32.1,38.225 36.359,38.225 40.618,38.225 44.876,38.225 49.135,38.225 53.394,38.225 57.653,38.225 61.912,38.225 66.171,38.225 70.419,38.225 2.288,38.3 6.547,38.3 10.806,38.3 15.065,38.3 19.324,38.3 23.582,38.3 27.841,38.3
  other v3: 3.125,3.125 149.275,3.125 3.125,76.375 149.275,76.375
INHIBIT: 
LED_STLINK: 
NetC1_2: 
NetC7_2: C7.2 R5.1 | length 1.3
  Top Layer w0.254: C7.2 R5.1
NetC8_2: C8.2 R6.1 | length 1.3
  Top Layer w0.254: R6.1 C8.2
NetC9_2: 
NetC11_1: 
NetC12_1: 
NetC20_2: 
NetC21_2: 
NetC27_2: 
NetC31_2: 
NetC32_2: 
NetC36_2: 
NetC56_1: 
NetC63_1: 
NetC64_1: 
NetC65_1: 
NetC71_2: 
NetCON6_1: 
NetCON6_2: 
NetCON6_11: 
NetCON6_12: 
NetCON7_4: 
NetCON12_9: 
NetD5_2: 
NetD7_1: 
NetD8_1: D8.1 R10.1
NetD9_1: D9.1 R11.1
NetD10_1: D10.1 R12.1
NetD12_2: 
NetD13_2: 
NetD14_2: 
NetD15_2: 
NetD16_2: 
NetD17_2: 
NetD18_2: 
NetD19_2: 
NetD20_2: 
NetD21_1: 
NetD21_2: 
NetD22_1: 
NetD23_1: 
NetD23_2: 
NetD24_1: 
NetD25_1: 
NetD26_1: 
NetD27_1: 
NetD28_1: 
NetD29_1: 
NetD30_1: 
NetD31_1: 
NetJ7_2: 
NetJ8_2: 
NetJ9_2: 
NetJ10_2: 
NetJ11_2: 
NetJ12_2: 
NetJ13_2: 
NetJ16_1: 
NetJ17_1: 
NetJ19_1: 
NetJ22_2: 
NetJ23_2: 
NetJ26_1: 
NetJ37_2: 
NetJ40_2: 
NetP7_1: 
NetP9_2: 
NetP9_4: 
NetP9_5: 
NetP9_6: 
NetQ1_1: 
NetQ1_2: 
NetQ2_1: 
NetQ2_2: 
NetR7_2: 
NetR25_1: 
NetR36_1: 
NetR37_1: 
NetR38_1: 
NetR39_1: 
NetR45_2: 
NetR54_2: 
NetR59_2: 
NetR60_1: 
NetR63_2: 
NetR97_2: 
NetR99_2: 
NetR101_2: 
NetR103_2: 
NRTS: 
OSC_25M: 
OSC_IN: 
OSC_OUT: 
OTG_FS_VB: 
PDR_ON: 
Port_A0: 
Port_A1: 
Port_A2: 
Port_A3: 
Port_A4: 
Port_A5: 
Port_A6: 
Port_A7: 
Port_A8: 
Port_A9: 
Port_A10: 
Port_A11: 
Port_A12: 
Port_A13: 
Port_A14: 
Port_A15: 
Port_B0: 
Port_B1: 
Port_B2: 
Port_B3: 
Port_B4: 
Port_B5: 
Port_B6: CON2.4
Port_B7: CON2.5
Port_B8: 
Port_B9: 
Port_B10: 
Port_B11: 
Port_B12: 
Port_B13: 
Port_B14: 
Port_B15: 
Port_C0: 
Port_C1: 
Port_C2: 
Port_C3: 
Port_C4: 
Port_C5: 
Port_C6: 
Port_C7: 
Port_C8: 
Port_C9: 
Port_C10: 
Port_C11: 
Port_C12: 
Port_C13: 
Port_C14: 
Port_C15: 
Port_D0: 
Port_D1: 
Port_D2: 
Port_D3: 
Port_D4: 
Port_D5: 
Port_D6: 
Port_D7: 
Port_D8: CON3.4
Port_D9: CON3.5
Port_D10: 
Port_D11: 
Port_D12: 
Port_D13: 
Port_D14: 
Port_D15: 
Port_E0: 
Port_E1: 
Port_E2: 
Port_E3: 
Port_E4: 
Port_E5: 
Port_E6: 
Port_E7: CON4.5
Port_E8: CON4.4
Port_E9: 
Port_E10: 
Port_E11: 
Port_E12: 
Port_E13: 
Port_E14: 
Port_E15: 
Port_F0: 
Port_F1: 
Port_F2: 
Port_F3: 
Port_F4: 
Port_F5: 
Port_F6: 
Port_F7: 
Port_F8: 
Port_F9: 
Port_F10: 
Port_F11: 
Port_F12: 
Port_F13: 
Port_F14: 
Port_F15: 
Port_G0: 
Port_G1: 
Port_G2: 
Port_G3: 
Port_G4: 
Port_G5: 
Port_G6: 
Port_G7: 
Port_G8: 
Port_G9: 
Port_G10: 
Port_G11: 
Port_G12: 
Port_G13: 
Port_G14: 
Port_G15: 
Port_H0: 
Port_H1: 
PWR_EXT: 
SS1: J3.1 R5.2 U1.6 | length 82.1
  Top Layer w0.254: J3.1 R5.2 26.551,7.2 26.7,7.051 26.7,2.126 27.3,1.526 v1(27.3,1.5) ; U1.6 28.405,12.995 29.85,11.55 v1(30,11.55)
  Bottom Layer w0.2: v1(27.3,1.5) 27.3,8.85 v1(30,11.55) 39.3,20.85 39.3,32.675 41.675,35.05 66.1,35.05 69.2,38.15
SS2: J4.1 R6.2 U1.11 | length 71
  Top Layer w0.254: J4.1 R6.2 26.551,30.8 26.7,30.949 26.7,35.874 v1@27.3,36.474 ; U1.11 28.405,25.005 v1@29.85,26.45
  Bottom Layer w0.2: v1(30,26.45) 27.3,29.15 v1(27.3,36.5) 28.475,36.5 29.525,35.45 65.934,35.45 68.917,38.433
STM_JTCK: 
STM_JTMS: 
STM_RST: 
SWout1: D1.2 L1.1 U1.4
SWout2: D2.2 L2.1 U1.13
T_JRST: 
T_JTCK: 
T_JTDI: 
T_JTDO: 
T_JTMS: 
T_NRST: 
T_SWDIO_IN: 
T_SWO: 
USB_RENUMn: 
VCAP_1: 
VCAP_2: 
VDD: 
VDDA: 
Vref1: R1.1 R3.2 U1.7 | length 7.7
  Top Layer w0.254: U1.7 29.675,13.02 30.034,12.661 R1.1 R3.2
Vref2: R2.1 R4.2 U1.10 | length 7.7
  Top Layer w0.254: U1.10 29.675,24.98 30.034,25.339 R2.1 R4.2
VREF+: 
VSSA: 
pads on no net: CON2. CON3. CON4. CON5. U1.8 U1.16
copper on no net: | length 4.9
  Top Layer w0.3: 73.525,2.245 75.17,2.245 ; 73.525,9.95 75.17,9.95 ; 73.525,17.655 75.17,17.655

## Polygon pours and split planes (outlines as drawn)
GND on Top Layer "GND_L01_P133" (solid, pour order 133): 71.2,0 72.375,0 72.375,18.425 71.2,19.6
GND on Top Layer "GND_L01_P132" (solid, pour order 132): 0,39.075 70.65,39.075 71.2,38.525 71.2,0 69.554,0 69.55,36.2 68.325,37.425 0,37.425
GND on Top Layer "GND_L01_P028" (solid, pour order 28): 17.2,38.6 8.6,38.6 8.6,31 9.4,30.2 17.2,30.2
+12V on Top Layer "+12V_L01_P010" (solid, pour order 10): 0,31.444 0,37 7,37 8.1,35.9 8.1,30.9 9.3,29.7 16.25,29.7 20,25.95 20,10 19.4,10 17.3,12.1 17.3,16.3 12.5,21.1 12.5,24.144 10.444,26.2 8,26.2 5.24,28.96 5.24,31.444
GND on Top Layer "GND_L01_P006" (solid, pour order 6): 16.8,11.815 19.115,9.5 25.4,9.5 26.315,8.585 26.315,0 16.8,0
GND on Top Layer "GND_L01_P038" (solid, pour order 38): 16.258,30.467 18.225,28.5 25.4,28.5 26.315,29.415 26.315,38.6 16.258,38.6
+3V3_SPI on Top Layer "+3V3_SPI_L01_P124" (solid, pour order 124): 67.875,18.75 69.125,17.5 69.125,11.4 67.875,10.15 58.8,10.15 54.85,14.1 45.5,14.1 43.1,11.7 43.1,7.2 41.5,5.6 33.5,5.6 30.2,8.9 30.2,10.4 31.35,11.55 34.775,11.55 35.225,12 35.225,14.329 36.85,14.329 41.271,18.75
GND on Top Layer "GND_L01_P050" (solid, pour order 50): 31.75,19 31.75,17 33.278,15.472 37.272,15.472 38.4,16.6 38.4,19
GND on Top Layer "GND_L01_P049" (solid, pour order 49): 31.75,19 31.75,21 33.278,22.528 37.272,22.528 38.4,21.4 38.4,19
no net on Top Layer "NONET_L01_P048" (solid, pour order 48): 36.152,23.1 36.702,23.1
+5V_SPI on Top Layer "+5V_SPI_L01_P044" (solid, pour order 44): 67.875,19.25 69.125,20.5 69.125,26.6 67.875,27.85 58.8,27.85 54.85,23.9 45.5,23.9 43.1,26.3 43.1,30.8 41.5,32.4 33.5,32.4 30.2,29.1 30.2,27.6 31.35,26.45 34.775,26.45 35.225,26 35.225,23.671 36.85,23.671 41.271,19.25
+12V on Top Layer "+12V_L01_P082" (solid, pour order 82): 21.9,28 17.95,28 19.15,26.8 21.9,26.8
+12V_FUSE on Top Layer "+12V_FUSE_L01_P130" (solid, pour order 130): 84.695,2.99 85.495,3.79 85.495,7.6 84.695,8.4 80.57,8.4 79.77,7.6 79.77,3.79 80.57,2.99
+12V_FUSE on Top Layer "+12V_FUSE_L01_P069" (solid, pour order 69): 138.5,14.724 ccw(c138.5,12.624) 136.4,12.624 ccw(c138.5,12.624) 138.5,10.524 142.8,10.524 cw(c142.8,8.593) 144.166,9.958 144.3,9.824 ccw(c145.507,11.031) 145.507,9.324 151.6,9.324 151.6,16.024 145.752,16.024 ccw(c145.748,13.976) 144.3,15.424 144.166,15.29 cw(c142.8,16.655) 142.8,14.724
+12V_FUSE on Top Layer "+12V_FUSE_L01_P070" (solid, pour order 70): 138.5,29.924 ccw(c138.5,27.824) 136.4,27.824 ccw(c138.5,27.824) 138.5,25.724 142.8,25.724 cw(c142.8,23.793) 144.166,25.158 144.3,25.024 ccw(c145.507,26.231) 145.507,24.524 151.6,24.524 151.6,31.224 145.752,31.224 ccw(c145.748,29.176) 144.3,30.624 144.166,30.49 cw(c142.8,31.855) 142.8,29.924
+5V_SPI on Top Layer "+5V_SPI_L01_P057" (solid, pour order 57): 73.425,23.81 72.625,23.01 72.625,19.2 73.425,18.4 77.55,18.4 78.35,19.2 78.35,23.01 77.55,23.81
+3V3_SPI on Top Layer "+3V3_SPI_L01_P058" (solid, pour order 58): 73.425,16.105 72.625,15.305 72.625,11.495 73.425,10.695 77.55,10.695 78.35,11.495 78.35,15.305 77.55,16.105
+12V on Top Layer "+12V_L01_P053" (solid, pour order 53): 73.425,8.4 72.625,7.6 72.625,3.79 73.425,2.99 77.55,2.99 78.35,3.79 78.35,7.6 77.55,8.4
+3V3_SPI_FUSE on Top Layer "+3V3_SPI_FUSE_L01_P129" (solid, pour order 129): 84.695,10.695 85.495,11.495 85.495,15.305 84.695,16.105 80.57,16.105 79.77,15.305 79.77,11.495 80.57,10.695
+5V_SPI_FUSE on Top Layer "+5V_SPI_FUSE_L01_P126" (solid, pour order 126): 84.695,18.4 85.495,19.2 85.495,23.01 84.695,23.81 80.57,23.81 79.77,23.01 79.77,19.2 80.57,18.4
SWout1 on Top Layer "SWOUT1_L01_P125" (solid, pour order 125): 25.46,12.6 25.46,10.14 27.2,8.4 27.2,4.55 30.75,1 67.875,1 69.125,2.25 69.125,8.175 67.875,9.2 58.7,9.2 57.6,8.1 52.2,8.1 51.2,7.1 51.2,6.1 50.2,5.1 33.2,5.1 29.7,8.6 29.7,10.4 27.5,12.6
SWout2 on Top Layer "SWOUT2_L01_P046" (solid, pour order 46): 25.46,25.4 25.46,27.86 27.2,29.6 27.2,33.45 30.75,37 67.875,37 69.125,35.75 69.125,29.825 67.875,28.8 58.7,28.8 57.6,29.9 52.2,29.9 51.2,30.9 51.2,31.9 50.2,32.9 33.2,32.9 29.7,29.4 29.7,27.6 27.5,25.4
+12V_FUSE on Top Layer "+12V_FUSE_L01_P071" (solid, pour order 71): 138.5,45.124 ccw(c138.5,43.024) 136.4,43.024 ccw(c138.5,43.024) 138.5,40.924 142.8,40.924 cw(c142.8,38.993) 144.166,40.358 144.3,40.224 ccw(c145.507,41.431) 145.507,39.724 151.6,39.724 151.6,46.424 145.752,46.424 ccw(c145.748,44.376) 144.3,45.824 144.166,45.69 cw(c142.8,47.055) 142.8,45.124
+12V_FUSE on Top Layer "+12V_FUSE_L01_P072" (solid, pour order 72): 138.5,60.324 ccw(c138.5,58.224) 136.4,58.224 ccw(c138.5,58.224) 138.5,56.124 142.8,56.124 cw(c142.8,54.193) 144.166,55.558 144.3,55.424 ccw(c145.507,56.631) 145.507,54.924 151.6,54.924 151.6,61.624 145.752,61.624 ccw(c145.748,59.576) 144.3,61.024 144.166,60.89 cw(c142.8,62.255) 142.8,60.324
+12V on Top Layer "+12V_L01_P020" (solid, pour order 20): 20,10 24.9,10 25,10.1 25,12.941 21.059,12.941 20,14
+12V on Top Layer "+12V_L01_P023" (solid, pour order 23): 22.975,14.2 23.675,14.2 23.675,13.15 23.884,12.941 24,12.941 24,12.6 22.6,12.6 22.6,12.941 22.766,12.941 22.975,13.15
+12V on Top Layer "+12V_L01_P024" (solid, pour order 24): 24.245,14.2 24.945,14.2 24.945,12.996 25,12.941 25,12.6 23.87,12.6 23.87,12.941 24.036,12.941 24.245,13.15
+12V on Top Layer "+12V_L01_P037" (solid, pour order 37): 22.975,23.8 23.675,23.8 23.675,24.85 23.884,25.059 24,25.059 24,25.4 22.6,25.4 22.6,25.059 22.766,25.059 22.975,24.85
SWout1 on Top Layer "SWOUT1_L01_P039" (solid, pour order 39): 25.865,14.2 25.515,14.2 25.515,12.996 25.46,12.941 25.46,12.6 27.5,12.6 27.5,12.787 27.5,12.81 27.369,12.941 26.424,12.941 26.215,13.15 26.215,14.2
SWout2 on Top Layer "SWOUT2_L01_P047" (solid, pour order 47): 25.865,23.8 25.515,23.8 25.515,25.004 25.46,25.059 25.46,25.4 27.5,25.4 27.5,25.213 27.5,25.19 27.369,25.059 26.424,25.059 26.215,24.85 26.215,23.8
GND on Top Layer "GND_L01_P103" (solid, pour order 103): 21,16.75 21.75,16 32.8,16 32.8,19 21,19
GND on Top Layer "GND_L01_P101" (solid, pour order 101): 21,21.25 21.75,22 32.8,22 32.8,19 21,19
+12V on Top Layer "+12V_L01_P025" (solid, pour order 25): 19.15,26.846 23.829,26.846 24.2,26.475 24.2,25.175 24.084,25.059 21.059,25.059 20,24 19.15,24
GND on Top Layer "GND_L01_P032" (solid, pour order 32): 45.864,13.1 54.3,13.1 55.724,11.676 55.724,9.324 55.06,8.66 52.06,8.66 50.7,7.3 50.7,6.3 50,5.6 45.7,5.6 44.1,7.2 44.1,11.336
GND on Top Layer "GND_L01_P045" (solid, pour order 45): 45.864,24.9 54.3,24.9 55.724,26.324 55.724,28.676 55.06,29.34 52.06,29.34 50.7,30.7 50.7,31.7 50,32.4 45.7,32.4 44.1,30.8 44.1,26.664
+12V on Top Layer "+12V_L01_P012" (solid, pour order 12): 0,19.49 4.39,19.49 5.7,20.8 5.7,24 5.017,24.683 5.017,32.513 3.986,33.544 0,33.544
GND on Top Layer "GND_L01_P005" (solid, pour order 5): 0,11.815 16.8,11.815 16.8,8.614 16.8,0 0,0
+12V_JACK on Top Layer "+12V_JACK_L01_P003" (solid, pour order 3): 0,12.9 16.8,12.9 16.8,16.1 12,20.9 12,24 10.3,25.7 8,25.7 6.3,24 6.3,20.6 4.7,19 0,19
GND on Bottom Layer "GND_L04_P114" (solid, pour order 114): 0,39.075 70.65,39.075 71.2,38.525 71.2,0 0,0
+5V_SPI_FUSE on Int2 (PWR) (split plane): 334 vertices, not listed, extent 41.086,10.07 141.649,79.398
+5V_SPI on Int2 (PWR) (split plane): 40.582,32.566 40.59,32.501 40.616,32.44 40.656,32.388 48.264,24.779 48.316,24.739 48.377,24.714 48.443,24.705 75.623,24.705 78.773,21.556 78.773,18.102 28.093,18.102 28.093,18.8 28.093,29.441 28.093,37.348 40.582,37.348
+12V_FUSE on Int2 (PWR) (split plane): 152.298,0.102 79.277,0.102 79.277,9.295 88.398,9.295 93.248,4.446 93.3,4.406 93.361,4.38 93.426,4.372 144.53,4.372 144.7,4.381 144.869,4.41 145.033,4.457 145.191,4.522 145.34,4.605 145.479,4.704 145.606,4.818 145.72,4.945 145.819,5.084 145.902,5.233 145.967,5.391 146.014,5.555 146.043,5.724 146.052,5.894 146.052,9.424 146.052,79.398 152.298,79.398
+3V3_SPI_FUSE on Int2 (PWR) (split plane): 312 vertices, not listed, extent 79.277,4.875 145.549,79.398
+5V_USB_STLINK on Int2 (PWR) (split plane): 127.848,30.629 120.83,23.612 89.07,23.612 84.677,28.004 84.677,39.675 84.669,39.74 84.643,39.801 84.603,39.853 77.47,46.987 77.448,47.039 77.408,47.091 74.396,50.103 74.343,50.143 74.283,50.169 74.217,50.177 58.1,50.177 58.035,50.169 57.974,50.143 57.922,50.103 57.882,50.051 57.856,49.99 57.848,49.925 57.848,47.462 56.222,45.836 56.182,45.784 56.156,45.723 56.148,45.658 56.148,39.229 54.771,37.852 0.102,37.852 0.102,79.398 127.848,79.398
+3V3_SPI on Int2 (PWR) (split plane): 78.773,9.8 60.547,9.8 60.482,9.791 60.421,9.766 60.369,9.726 55.996,5.352 32.504,5.352 28.093,9.763 28.093,13.391 28.093,17.598 78.773,17.598
+12V on Int2 (PWR) (split plane): 27.589,35.141 27.589,29.441 27.589,18.8 27.589,17.85 27.589,13.391 27.589,9.659 27.598,9.594 27.623,9.533 27.663,9.481 32.222,4.922 32.274,4.882 32.335,4.856 32.4,4.848 56.1,4.848 56.165,4.856 56.226,4.882 56.278,4.922 60.652,9.295 78.773,9.295 78.773,0.102 0.102,0.102 0.102,37.348 27.589,37.348
GND on Int1 (GND) (split plane): 152.298,0.102 0.102,0.102 0.102,79.398 152.298,79.398

## Other copper
Top Layer:
  pour cut-out: 26.315,31.188 25.164,31.188 25.164,34.588 26.315,34.591
  pour cut-out: 25.161,6.812 26.312,6.812 26.312,3.412 25.161,3.409
Int2 (PWR) (plane layer: these items are gaps in the copper):
  lines w0.5: 0,37.6 28.778,37.6 ; 27.841,18.8 27.841,13.391 27.841,9.659 32.4,5.1 56.1,5.1 60.547,9.547 82.947,9.547 88.503,9.547 93.426,4.624 144.53,4.624 ccw(c144.53,5.894) 145.8,5.894 145.8,9.424 145.8,79.5 ; 27.841,35.141 27.841,37.6 ; 35.8,37.6 27.841,37.6 ; 40.834,37.567 40.834,32.566 48.443,24.957 75.728,24.957 79.025,21.66 79.025,0 ; 77.209,46.891 84.425,39.675 84.425,27.9 88.965,23.36 120.935,23.36 128.1,30.525 128.1,79.6 ; 77.23,46.912 74.217,49.925 65.337,49.925 65.287,49.925 58.1,49.925 ; 141.9,79.475 141.9,70.244 cw(c140.63,70.244) 140.63,68.974 137.67,68.974 ccw(c137.67,67.704) 136.4,67.704 136.4,65.544 ccw(c137.67,65.544) 137.67,64.274 140.63,64.274 cw(c140.63,63.004) 141.9,63.004 141.9,55.044 cw(c140.63,55.044) 140.63,53.774 137.67,53.774 ccw(c137.67,52.504) 136.4,52.504 136.4,50.344 ccw(c137.67,50.344) 137.67,49.074 140.63,49.074 cw(c140.63,47.804) 141.9,47.804 141.9,39.844 cw(c140.63,39.844) 140.63,38.574 137.67,38.574 ccw(c137.67,37.304) 136.4,37.304 136.4,35.144 ccw(c137.67,35.144) 137.67,33.874 140.63,33.874 cw(c140.63,32.604) 141.9,32.604 141.9,24.644 cw(c140.63,24.644) 140.63,23.374 137.67,23.374 ccw(c137.67,22.104) 136.4,22.104 136.4,19.944 ccw(c137.67,19.944) 137.67,18.674 140.63,18.674 cw(c140.63,17.404) 141.9,17.404 141.9,11.089 cw(c140.63,11.089) 140.63,9.819 96.606,9.819 89.172,17.253 81.952,17.252 81.355,17.85 27.841,17.85 27.841,29.441 27.841,37.6 ; 27.841,37.6 54.875,37.6 56.4,39.125 56.4,45.658 58.1,47.358 58.1,49.925 ; 58.1,49.925 58.1,49.925

## Text inside footprints (layer, text, board x,y; h text height)
C3: Top Overlay "+" at 38.778,13.86 h1.52; Mechanical 13 "+" at 38.778,13.86 h1.52
C4: Top Overlay "+" at 38.778,31.54 h1.52; Mechanical 13 "+" at 38.778,31.54 h1.52
C14: Top Overlay "+" at 2.09,36.144 h1.52; Mechanical 13 "+" at 2.09,36.144 h1.52
CON2: Top Overlay "1" at 138,68.77 h1 r270; Top Overlay "4" at 133.8,68.937 h1 r270
CON3: Top Overlay "1" at 138,53.57 h1 r270; Top Overlay "4" at 133.8,53.737 h1 r270
CON4: Top Overlay "1" at 138,38.37 h1 r270; Top Overlay "4" at 133.8,38.537 h1 r270
CON5: Top Overlay "4" at 133.8,23.337 h1 r270; Top Overlay "1" at 138,23.17 h1 r270
L1: Top Overlay "470" at 64.008,8.264 h1.52 r90; Mechanical 13 "470" at 64.008,8.264 h1.52 r90
L2: Top Overlay "470" at 62.484,29.736 h1.52 r270; Mechanical 13 "470" at 62.484,29.736 h1.52 r270